# EAGLE board gate (EAGLE 8.2.2)
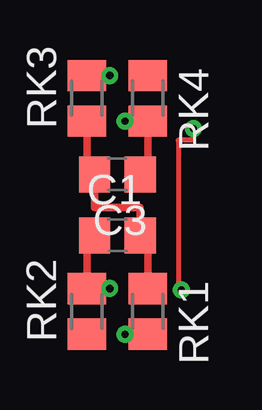
[diagram p0: board, top side]
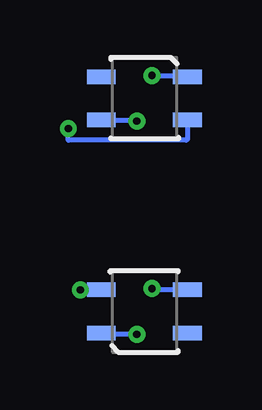
[diagram p1: board, bottom side, seen from below]

No outline drawn. Coordinates in mm, seen from the top.
Copper layers (1*16): Top 0.035mm / dielectric 1.5mm / Bottom 0.035mm
Design rules "default": minimum track width 6mil, minimum drill 0.35mm, track to track 6mil, track to pad 6mil, pad to pad 6mil, via to via 6mil, smd to smd 6mil, copper to edge 40mil, drill to drill 6mil, minimum pad ring 10mil, minimum via ring 8mil, stop-mask expansion 4mil, vias tented up to drill 0mil, thermal gap 10mil
Net classes: 1 power: width 0.203 mm, drill 0.305 mm, clearance 0.25 mm

## Footprints (pad centres in the part's own frame; a part is rotated, then mirrored left to right if it is on the bottom)
C0805 = smd 1.3 x 1.5: 1 -0.95,0; 2 0.95,0
QRE1113 = smd 1.2 x 0.6: 1 -1.8,-0.9; 2 1.8,-0.9; 3 1.8,0.9; 4 -1.8,0.9
M0805 = smd 1.3 x 1.6: 1 -0.95,0; 2 0.95,0

## Placement (x,y rotation side)
C1  10n  [C0805]  2.86,5.4 0 top
C3  10n  [C0805]  2.86,7.94 180 top
O1  QRE1113  [QRE1113]  2.86,11.11 180 bottom
O2  QRE1113  [QRE1113]  2.86,2.22 0 bottom
RK1  1k  [M0805]  4.13,2.22 270 top
RK2  220  [M0805]  1.59,2.22 90 top
RK3  1k  [M0805]  1.59,11.11 90 top
RK4  220  [M0805]  4.13,11.11 270 top

## Library data of the parts
C1 C3 = rcl
O1 O2 = SparkFun
RK1-RK4 = resistor

## Nets
3.3V [power]: C1.2 C3.2 RK1.1 RK3.1
DMUX1: O1.2
DMUX2: O2.2
GND [power]: O1.4 O2.4
MUX1: RK4.1
MUX2: RK2.1
RD1: O1.1 RK3.2
RD2: O2.1 RK1.2
Y1: C3.1 O1.3 RK4.2
Y2: C1.1 O2.3 RK2.2

## Tracks (layer width: path | path; a pad name or v marks a point on that pad's centre or on a via)
3.3V
  Top 0.305: RK3.1 1.59,8.26 C3.2 1.91,6.55 3.81,6.55 C1.2 4.13,5.4 RK1.1
GND  (via drill 0.3)
  Top 0.203: v6.03,9.84 6.03,9.37 5.4,9.37 5.4,3.17 5.48,3.17 v5.53,3.12
  Bottom 0.203: O1.4 1.06,9.42 1.11,9.37 6.03,9.37 v6.03,9.84 | v5.53,3.12 O2.4
RD1  (via drill 0.3)
  Top 0.203: RK3.2 v2.54,12.06
  Bottom 0.203: v2.54,12.06 1.06,12.06 O1.1
RD2  (via drill 0.3)
  Top 0.203: RK1.2 v3.17,1.27
  Bottom 0.203: v3.17,1.27 4.66,1.27 O2.1
Y1  (via drill 0.3)
  Top 0.203: v3.17,10.16 RK4.2
  Top 0.305: RK4.2 4.13,8.26 C3.1
  Bottom 0.203: O1.3 3.17,10.21 v3.17,10.16
Y2  (via drill 0.3)
  Top 0.203: v2.54,3.17 RK2.2
  Top 0.305: C1.1 1.59,5.4 RK2.2
  Bottom 0.203: O2.3 2.54,3.12 v2.54,3.17